# EAGLE board template (EAGLE 8.4.2)

Size 40.64 x 21.59 mm. Coordinates in mm from the lower left corner, seen from the top.
Outline: 0,0 40.62,0 40.64,21.59 0,21.59 0,0
Copper layers (1*16): Top 0.035mm / dielectric 1.5mm / Bottom 0.035mm
Design rules "default": minimum track width 6mil, minimum drill 0.35mm, track to track 6mil, track to pad 6mil, pad to pad 6mil, via to via 6mil, smd to smd 6mil, copper to edge 40mil, drill to drill 6mil, minimum pad ring 10mil, minimum via ring 8mil, stop-mask expansion 4mil, vias tented up to drill 0mil, thermal gap 10mil

## Placement (x,y rotation side)
FRAME1  [DOCFIELD]  39.37,1.27 0 bottom

## Library data of the parts
FRAME1 = openag-frames; AUTHOR: XX; DESCRIPTION: Template for starting new designs.; TITLE: Example Template!; URL: https://github.com/OpenAgInitiative/openag_eagle_template; VER: 1.0